# Altium PCB PCB2.PcbDoc (part 1 of 3)
Units mil, origin at the board's own origin, x right, y up, seen from the top; angles counter-clockwise.
Board outline 7178.34 x 3937 mil, 2 copper layers (Top Layer, Bottom Layer); 141 components, 57 nets, 393 pads, 76 vias.
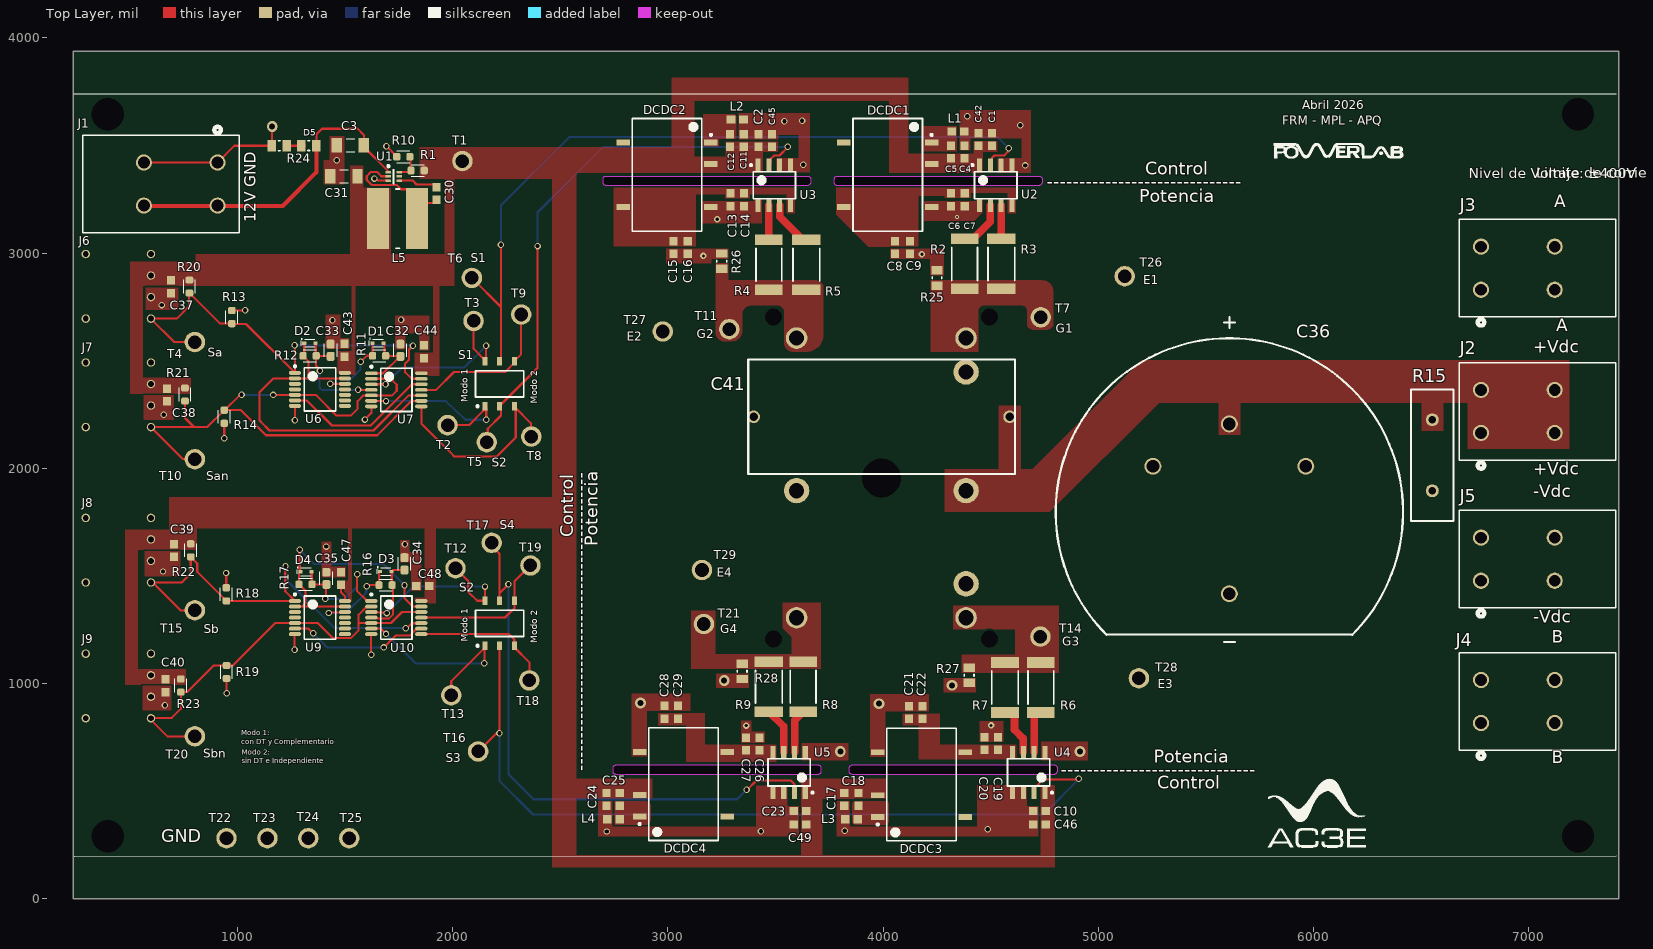
[diagram p0: Top Layer view]
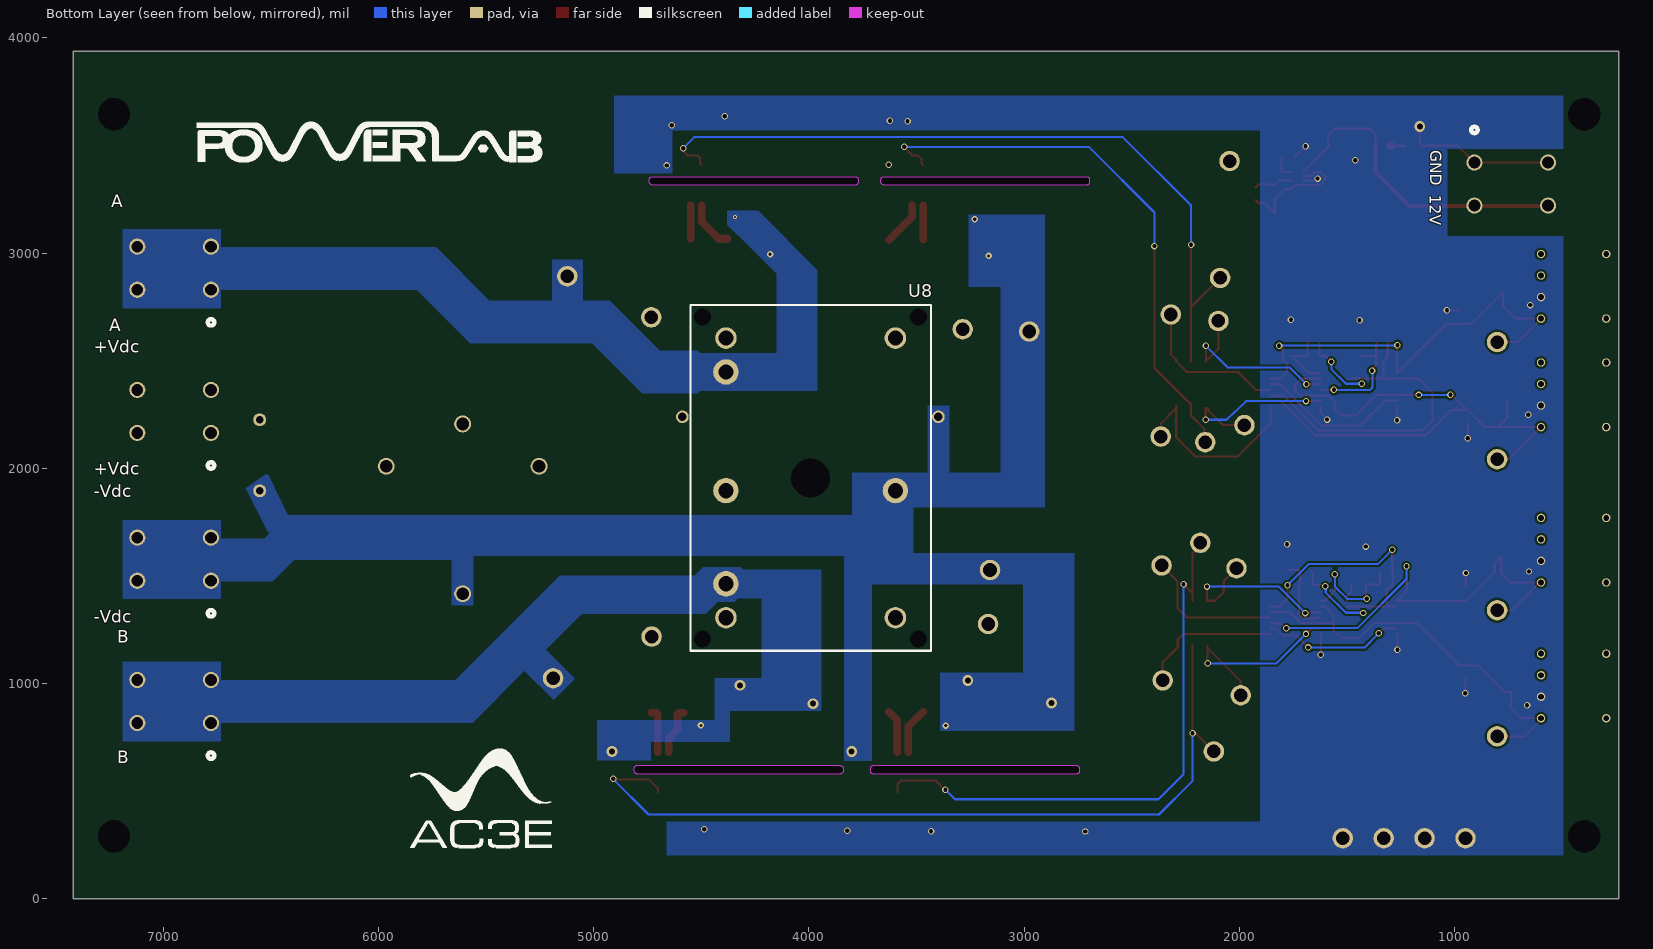
[diagram p1: Bottom Layer view, seen from below]
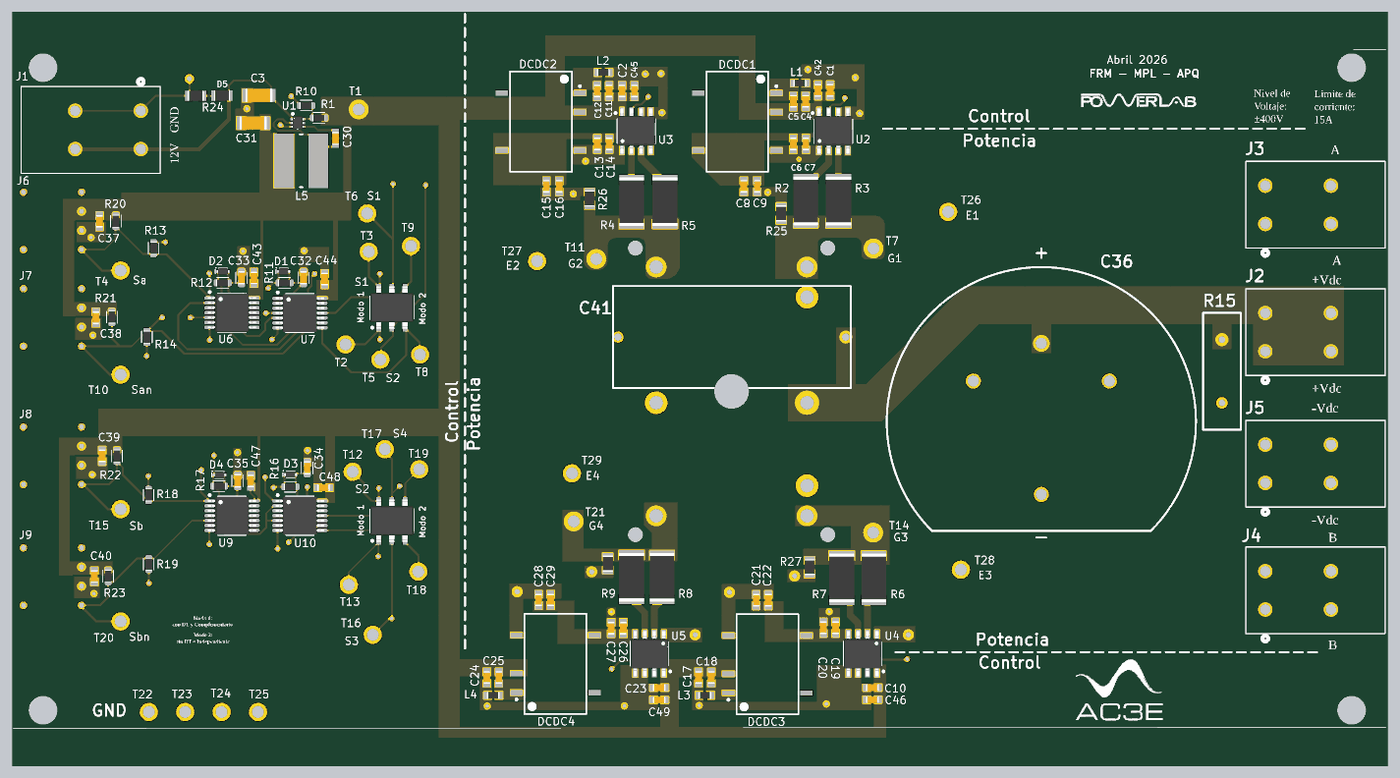
[diagram p2: 3D render of the assembled board from above, using the file's embedded part models]

## Layer stack, top to bottom
Top Solder: solder mask 0.4, Solder Resist, Dk 3.5
Top Layer: signal copper 1.4
Dielectric 1: dielectric 12.6, FR-4, Dk 4.8
Bottom Layer: signal copper 1.4
Bottom Solder: solder mask 0.4, Solder Resist, Dk 3.5

## Board outline
238,0 7416.34,0 7416.34,3937 238,3937
cut-out: 3666,3333 3666,3340 ccw(c3650,3340) 3650,3356 2710,3356 ccw(c2710,3342) 2696,3342 2696,3331 ccw(c2711,3331) 2711,3316 3649,3316 ccw(c3649,3333)
cut-out: 4810,594 4810,607 ccw(c4797,607) 4797,620 3856,620 ccw(c3856,604) 3840,604 3840,596 ccw(c3856,596) 3856,580 4796,580 ccw(c4796,594)
cut-out: 4741,3333 4741,3340 ccw(c4725,3340) 4725,3356 3785,3356 ccw(c3785,3342) 3771,3342 3771,3330 ccw(c3785,3330) 3785,3316 4724,3316 ccw(c4724,3333)
cut-out: 3713,593 3713,606 ccw(c3699,606) 3699,620 2757,620 ccw(c2757,606) 2743,606 2743,593 ccw(c2756,593) 2756,580 3700,580 ccw(c3700,593)

## Design rules (kind name [scope] priority, off if disabled: settings)
Clearance Clearance_Power [InNetClass('Power_Nets') vs InNetClass('Power_Nets')] p1: gap=59.06 ignorepadtopadclearanceinfootprint=FALSE
Clearance Clearance_U1 [InComponent('U1')] p2: gap=7 ignorepadtopadclearanceinfootprint=FALSE
Clearance Clearance_1 [All] p3: gap=10 ignorepadtopadclearanceinfootprint=FALSE
Clearance Clearance_Power_vs_Control [InNetClass('Power_Nets') And  Not InComponent('DCDC1','DCDC2','DCDC3','DCDC4','U2','U3','U4','U5','C6','C7','C8','C9','C13','C14','C15','C16','C19','C20','C21','C22','C26','C27','C28','C29') vs InNetClass('Control_Nets')] p4: gap=80 ignorepadtopadclearanceinfootprint=FALSE
PolygonConnect [All] p1: connectstyle=Direct reliefconductorwidth=10 reliefentries=4 polygonreliefangle="90 Angle" airgapwidth=10
RoutingVias [All] p1: holewidth=28 width=50 viastyle="Through Hole" minholewidth=5 minwidth=5 maxholewidth=28 maxwidth=50
SolderMaskExpansion [All] p1: expansion=4 istentingtop=FALSE
SupplyNets "Schematic Supply Nets_1" [InNet('Vdc')] p1: voltage=0.000
SupplyNets "Schematic Supply Nets" [InNet('-Vdc')] p2: voltage=0.000
SupplyNets "Schematic Supply Nets_6" [InNet('12V')] p3: voltage=0.000
SupplyNets "Schematic Supply Nets_4" [InNet('GND')] p4: voltage=0.000
Width [All] p1: maxlimit=200 minlimit=10 preferedwidth=10 toplayer_maxwidth=40 minimp=50.000000 maximp=50.000000 favimp=50.000000
30 further rules are at their usual default settings.

## Components (designator, comment, footprint, x,y, rotation, side; value= is the part's Value field where it differs from the comment)
C1 "220nF" GRM188R71E224JA88D 4506,3528 r90 top
C2 "220nF" GRM188R71E224JA88D 3420,3524 r90 top
C3 "10µF" GCM31CR71C106KA64K 1524,3501 r0 top
C4 "4.7µF" GRM188R71E224JA88D 4378,3470 r90 top
C5 "4.7µF" GRM188R71E224JA88D 4314,3470 r90 top
C6 "100nF" GRM188R71E224JA88D 4314,3248 r90 top
C7 "10nF" GRM188R71E224JA88D 4379,3248 r90 top
C8 "10µF" GRM188R71E224JA88D 4055,3026.47 r270 top
C9 "4.7µF" GRM188R71E224JA88D 4125,3026.47 r270 top
C10 "220nF" GRM188R71E224JA88D 4726,409 r180 top
C11 "4.7µF" GRM188R71E224JA88D 3352,3524 r90 top
C12 "4.7µF" GRM188R71E224JA88D 3289,3524 r90 top
C13 "100nF" GRM188R71E224JA88D 3290,3248 r90 top
C14 "10nF" GRM188R71E224JA88D 3353,3248 r90 top
C15 "10µF" GRM188R71E224JA88D 3025,3026.47 r270 top
C16 "4.7µF" GRM188R71E224JA88D 3092,3026.47 r270 top
C17 "4.7µF" GRM188R71E224JA88D 3819,462.3 r270 top
C18 "4.7µF" GRM188R71E224JA88D 3885,462.3 r270 top
C19 "100nF" GRM188R71E224JA88D 4534,722 r270 top
C20 "10nF" GRM188R71E224JA88D 4471,722 r270 top
C21 "10µF" GRM188R71E224JA88D 4120,866 r90 top
C22 "4.7µF" GRM188R71E224JA88D 4183,866 r90 top
C23 "220nF" GRM188R71E224JA88D 3613,409 r180 top
C24 "4.7µF" GRM188R71E224JA88D 2714,462.3 r270 top
C25 "4.7µF" GRM188R71E224JA88D 2776,462.3 r270 top
C26 "100nF" GRM188R71E224JA88D 3426,720 r270 top
C27 "10nF" GRM188R71E224JA88D 3363,720 r270 top
C28 "10µF" GRM188R71E224JA88D 2984,867 r90 top
C29 "4.7µF" GRM188R71E224JA88D 3047,867 r90 top
C30 "100nF" GRM188R71E224JA88D 1924,3277 r90 top
C31 "22µF" GCM31CR71C106KA64K 1494.01,3357 r0 top
C32 "470pF" "C0603 - MURATA" 1757,2549 r270 top
C33 "470pF" "C0603 - MURATA" 1433,2549 r270 top
C34 "470pF" "C0603 - MURATA" 1776,1556.54 r270 top
C35 "470pF" "C0603 - MURATA" 1413,1489 r270 top
C36 "1000uF" 1316N 5608.31,1467.72 r0 top
C37 "100nF" GRM188R71E224JA88D 692,2844 r270 top
C38 "100nF" GRM188R71E224JA88D 673,2341 r270 top
C39 "100nF" GRM188R71E224JA88D 706,1619 r270 top
C40 "100nF" GRM188R71E224JA88D 665,990 r270 top
C41 "1µF" MKT1813510405 3992.71,2239.65 r0 top
C42 "10µF" GRM188R71E224JA88D 4442,3528 r270 top
C43 "100nF" GRM188R71E224JA88D 1498,2549 r270 top
C44 "100nF" GRM188R71E224JA88D 1867,2542 r270 top
C45 "10µF" GRM188R71E224JA88D 3484,3524 r270 top
C46 "10µF" GRM188R71E224JA88D 4726,346 r0 top
C47 "100nF" GRM188R71E224JA88D 1481,1488 r270 top
C48 "100nF" GRM188R71E224JA88D 1861,1453 r0 top
C49 "10µF" GRM188R71E224JA88D 3613,345 r0 top
D1 "NSVRB751S40T1G" NSVRB751S40T1G 1653,2582 r0 top
D2 "NSVRB751S40T1G" NSVRB751S40T1G 1336,2582 r0 top
D3 "NSVRB751S40T1G" NSVRB751S40T1G 1689,1521 r0 top
D4 "NSVRB751S40T1G" NSVRB751S40T1G 1318,1520 r0 top
D5 "1kΩ" RC0805JR-101KL 1331,3500 r0 top
DCDC1 "PBT02F05S15" PBT02F05S15 4021.26,3364 r180 top
DCDC2 "PBT02F05S15" PBT02F05S15 2996,3364 r180 top
DCDC3 "PBT02F05S15" PBT02F05S15 4178.26,531.3 r0 top
DCDC4 "PBT02F05S15" PBT02F05S15 3072,533 r0 top
J1 "1017503" CONN_1017491 565,3221 r270 top
J2 "1017503" CONN_1017491 7120,2365 r90 top
J3 "1017503" CONN_1017491 7120,3030 r90 top
J4 "1017503" CONN_1017491 7120,1017 r90 top
J5 "1017503" CONN_1017491 7120,1678 r90 top
J6 "HFBR-0500ETZ" HFBR-0500ETZ 598,2696 r270 top
J7 "HFBR-0500ETZ" HFBR-0500ETZ 598,2192 r270 top
J8 "HFBR-0500ETZ" HFBR-0500ETZ 598,1470 r270 top
J9 "HFBR-0500ETZ" HFBR-0500ETZ 598,839 r270 top
L1 "LQM18DN220M70L" LQM18DN220M70L 4348,3565 r180 top
L2 "LQM18DN220M70L" LQM18DN220M70L 3322,3621 r180 top
L3 "LQM18DN220M70L" LQM18DN220M70L 3852,369.3 r0 top
L4 "LQM18DN220M70L" LQM18DN220M70L 2747,369.3 r0 top
L5 "3.3µH" 29332C 1744.45,3160 r180 top
R1 "52.3kΩ" "R0603 - YAGEO" 1837,3384 r0 top
R2 "10Ω" SR2512JK-0710RL 4378,2950 r270 top
R3 "3.3Ω" RMC1-3R30FTE 4549,2950 r270 top
R4 "10Ω" SR2512JK-0710RL 3469,2946 r270 top
R5 "3.3Ω" RMC1-3R30FTE 3643,2946 r270 top
R6 "10Ω" SR2512JK-0710RL 4733,982 r90 top
R7 "3.3Ω" RMC1-3R30FTE 4566,982 r90 top
R8 "10Ω" SR2512JK-0710RL 3628,985 r90 top
R9 "3.3Ω" RMC1-3R30FTE 3469,986 r90 top
R10 "10kΩ" "R0603 - YAGEO" 1770.49,3448 r0 top
R11 "3.09kΩ" "R0603 - YAGEO" 1658,2523 r180 top
R12 "3.09kΩ" "R0603 - YAGEO" 1335,2523 r180 top
R13 "10kΩ" "R0603 - YAGEO" 974,2703 r270 top
R14 "10kΩ" "R0603 - YAGEO" 939,2240 r90 top
R15 "100kΩ" MFR200FRF73-100K 6551.18,2061.02 r90 top
R16 "3.09kΩ" "R0603 - YAGEO" 1688,1458 r180 top
R17 "3.09kΩ" "R0603 - YAGEO" 1316,1461 r180 top
R18 "10kΩ" "R0603 - YAGEO" 948,1415 r270 top
R19 "10kΩ" "R0603 - YAGEO" 949,1054 r90 top
R20 "1kΩ" "R0603 - YAGEO" 777,2845 r90 top
R21 "1kΩ" "R0603 - YAGEO" 756,2343 r90 top
R22 "1kΩ" "R0603 - YAGEO" 783,1619 r90 top
R23 "1kΩ" "R0603 - YAGEO" 737,991 r90 top
R24 "1kΩ" RC0805JR-101KL 1194,3499 r0 top
R25 "10kΩ" RC0805JR-101KL 4250,2885 r90 top
R26 "10kΩ" RC0805JR-101KL 3250,2963 r90 top
R27 "10kΩ" RC0805JR-101KL 4399,1038.43 r270 top
R28 "10kΩ" RC0805JR-101KL 3345,1057 r270 top
S1 "SW_DPDT_CAS-220TB1" CAS-220-TB1 2218,2393 r90 top
S2 "SW_DPDT_CAS-220TB1" CAS-220-TB1 2218,1280 r90 top
T1 "THM_Test_Points" Test_Point#1 2045,3428 r0 top
T2 "THM_Test_Points" Test_Point#1 1976,2201 r0 top
T3 "THM_Test_Points" Test_Point#1 2097,2685 r0 top
T4 "THM_Test_Points" Test_Point#1 802,2587 r0 top
T5 "THM_Test_Points" Test_Point#1 2158,2122 r0 top
T6 "THM_Test_Points" Test_Point#1 2089,2885 r0 top
T7 "THM_Test_Points" Test_Point#1 4732,2702 r0 top
T8 "THM_Test_Points" Test_Point#1 2365,2148 r0 top
T9 "THM_Test_Points" Test_Point#1 2318,2715 r0 top
T10 "THM_Test_Points" Test_Point#2 757,2043 r0 top
T11 "THM_Test_Points" Test_Point#1 3285,2647 r0 top
T12 "THM_Test_Points" Test_Point#1 2013,1536 r0 top
T13 "THM_Test_Points" Test_Point#1 1993,946 r0 top
T14 "THM_Test_Points" Test_Point#1 4730.31,1218.5 r0 top
T15 "THM_Test_Points" Test_Point#3 817,1344 r0 top
T16 "THM_Test_Points" Test_Point#1 2118,685 r0 top
T17 "THM_Test_Points" Test_Point#1 2181,1654 r0 top
T18 "THM_Test_Points" Test_Point#1 2356,1015 r0 top
T19 "THM_Test_Points" Test_Point#1 2361,1549 r0 top
T20 "THM_Test_Points" Test_Point#4 804,755 r0 top
T21 "THM_Test_Points" Test_Point#1 3167,1277 r0 top
T22 "THM_Test_Points" Test_Point#1 949,282 r0 top
T23 "THM_Test_Points" Test_Point#1 1139,282 r0 top
T24 "THM_Test_Points" Test_Point#5 1329,281 r0 top
T25 "THM_Test_Points" Test_Point#5 1519,281 r0 top
T26 "THM_Test_Points" Test_Point#1 5122,2893 r0 top
T27 "THM_Test_Points" Test_Point#1 2976,2636 r0 top
T28 "THM_Test_Points" Test_Point#1 5188,1025 r0 top
T29 "THM_Test_Points" Test_Point#1 3158,1528 r0 top
U1 "AP62301Z6-7" AP62301Z6-6N 1726,3357 r0 top
U2 "NCV51152BADR2G" SOIC-NCV51152BADR2G 4523,3315.3 r270 top
U3 "NCV51152BADR2G" SOIC-NCV51152BADR2G 3494,3315.3 r270 top
U4 "NCV51152BADR2G" SOIC-NCV51152BADR2G 4676,587.3 r90 top
U5 "NCV51152BADR2G" SOIC-NCV51152BADR2G 3563,587.3 r90 top
U6 "74VHCT04AFT" 74VHCT04AFT 1383,2367 r0 top
U7 "74HC08T14-13" 74HC08T14-13 1738,2365 r0 top
U8 "SK15GH063" SK15GH063 3440.16,2753 r90 bottom
U9 "74VHCT04AFT" 74VHCT04AFT 1383,1307 r0 top
U10 "74HC08T14-13" 74HC08T14-13 1738,1307 r0 top

## Footprints (in the part's own frame and the unit in brackets; to place one, negate y for a bottom-side part, rotate by r counter-clockwise, add the part's x,y. Pads: shape width x height; smd on the part's side, far side on the other; paste and mask are expansions set on the pad)
74HC08T14-13 [mm] "TSOP, 14-Leads, Body 5,00x4,40mm, Pitch 0,65mm, IPC Medium Density"
  oval 1.45x0.45 smd: 1(-2.95,1.95) 2(-2.95,1.3) 3(-2.95,0.65) 4(-2.95,0) 5(-2.95,-0.65) 6(-2.95,-1.3) 7(-2.95,-1.95) 8(2.95,-1.95) 9(2.95,-1.3) 10(2.95,-0.65) 11(2.95,0) 12(2.95,0.65) 13(2.95,1.3) 14(2.95,1.95)
  silkscreen extent -3.07,-2.55 1.85,2.85, body extent -3.2,-2.55 3.2,2.55, height 1.2
74VHCT04AFT [mm] "TSOP, 14-Leads, Body 5,00x4,40mm, Pitch 0,65mm, IPC Medium Density"
  oval 1.45x0.45 smd: 1(-2.95,1.95) 2(-2.95,1.3) 3(-2.95,0.65) 4(-2.95,0) 5(-2.95,-0.65) 6(-2.95,-1.3) 7(-2.95,-1.95) 8(2.95,-1.95) 9(2.95,-1.3) 10(2.95,-0.65) 11(2.95,0) 12(2.95,0.65) 13(2.95,1.3) 14(2.95,1.95)
  silkscreen extent -3.07,-2.55 1.85,2.85, body extent -3.2,-2.55 3.2,2.55, height 1.2
1316N [mm]
  round 2 hole 1.5: 2(-9.024,13.77) 3(9.024,13.77) V+(0,18.77) V-(0,-1.27)
  silkscreen extent -20.5,-6.98 20.5,31.37
29332C [mm] "Precision Wire Wound Inductor, 2-Leads, Body 5,00x7,00mm, IPC Medium Density, 3.3uH"
  rect 2.6x7.2 smd: 1(-2.3,0) 2(2.3,0)
  silkscreen extent -0.2,-3.5 0.2,3.5
AP62301Z6-6N [mm] "SOTFL, 6-Leads, Body 1,60x1,60mm, Pitch 0,50mm, IPC Medium Density"
  rect 0.67x0.3 smd: 1(-0.635,0.5) 2(-0.635,0) 3(-0.635,-0.5) 4(0.635,-0.5) 5(0.635,0) 6(0.635,0.5)
  silkscreen extent -0.76,-0.85 0.05,1.32, body extent -0.8,-0.85 0.8,0.85, height 0.6
"C0603 - MURATA" [mm]
  rrect50% 1.05x0.95 smd: 1(-0.725,0) 2(0.725,0)
  silkscreen extent -0.76,-0.76 0.76,0.76, body extent -0.9,-0.45 0.9,0.45, height 0.9
CAS-220-TB1 [mm] "SOT23, 6-Leads, Body 5,40x5,10mm, Pitch 1,75mm, IPC Medium Density"
  rect 1x0.6 smd: 1(-2.65,1.75) 2(-2.65,0) 3(-2.65,-1.75) 4(2.65,1.75) 5(2.65,0) 6(2.65,-1.75)
  silkscreen extent -2.77,-2.85 1.55,2.85, body extent -2.8,-2.85 2.8,2.85, height 2.5
CONN_1017491 [mil]
  round 75 / inner round 60 / far side round 75 hole 55 paste-99999 mask+0: 1(-200,342.52) 2(0,342.52) 3(-200,0) 4(0,0)
  silkscreen extent -366,-283 127,444
GCM31CR71C106KA64K [mm] "Chip Capacitor, 2-Leads, Body 3,50x1,60mm, IPC Medium Density"
  rect 1.2x1.7 smd: 1(-1.6,0) 2(1.6,0)
  silkscreen extent -0.5,-0.75 0.5,0.75, body extent -1.8,-0.9 1.8,0.9, height 1.6
GRM188R71E224JA88D [mm] "Chip Capacitor, 2-Leads, Body 1,60x0,80mm, IPC Medium Density"
  rect 1x0.95 smd: 1(-0.75,0) 2(0.75,0)
  body extent -0.85,-0.45 0.85,0.45, height 0.9
HFBR-0500ETZ [mm]
  round 1 hole 0.7: 1(0,0) 2(-2.54,0) 3(-5.08,0) 4(-7.62,0) 5(-7.62,-7.7) 8(0,-7.7)
LQM18DN220M70L [mm] "Chip Inductor, 2-Leads, Body 1,60x0,80mm, IPC Medium Density"
  rect 1.02x0.98 smd: 1(-0.74,0) 2(0.74,0)
  body extent -0.87,-0.48 0.87,0.48, height 0.95
MFR200FRF73-100K [mil]
  round 60 hole 35.43: 1(-165,0) 2(165,0)
  silkscreen extent -305,-98 305,98
MKT1813510405 [mm] "Capacitores de películas 1uF 400V 10%"
  round 1.5 hole 1: 1(-15.105,0) 2(15.105,0)
  silkscreen extent -15.75,-6.76 15.75,6.76
NSVRB751S40T1G [mm] "SODFL, 2-Leads, Body 0,80x1,60mm, IPC Medium Density"
  rect 0.48x0.4 smd: 1(-0.66,0) 2(0.66,0)
  silkscreen extent -1.02,-0.45 0.6,0.55, body extent -0.8,-0.45 0.8,0.45, height 0.7
PBT02F05S15 [mm] "SOP, 8-Leads, Body 12,75x8,50mm, Pitch 2,54mm, IPC Medium Density"
  rect 1.6x0.7 smd: 1(-5.175,-3.81) 2(-5.175,-1.27) 4(-5.175,3.81) 5(5.175,3.81) 8(5.175,-3.81)
  silkscreen extent -5.3,-6.65 4.1,6.65, body extent -4.5,-6.65 4.5,6.65, height 9
"R0603 - YAGEO" [mm]
  rrect50% 0.85x0.9 smd: 1(-0.775,0) 2(0.775,0)
  silkscreen extent -0.77,-0.7 0.77,0.7, body extent -0.85,-0.45 0.85,0.45, height 0.55
RC0805JR-101KL [mm] "Chip Resistor, 2-Leads, Body 2,00x1,25mm, IPC Medium Density"
  rect 1x1.35 smd: 1(-0.9,0) 2(0.9,0)
  silkscreen extent -0.1,-0.58 0.1,0.58, body extent -1.05,-0.67 1.05,0.67, height 0.6
RMC1-3R30FTE [mm] "Chip Resistor, 2-Leads, Body 6,35x3,20mm, IPC Medium Density"
  rect 1.25x3.35 smd: 1(-2.95,0) 2(2.95,0)
  silkscreen extent -1.95,-1.58 1.95,1.58, body extent -3.22,-1.68 3.22,1.68, height 0.7
SK15GH063 [mm]
  round 2.54 hole 1.8: 1(-3.75,24) 8(-36.75,24) 9(-3.75,4) 16(-36.75,4)
  round 2.997 hole 1.8: 2(-7.75,24) 5(-21.75,24) 7(-32.75,24) 13(-21.75,4)
  round 0.127 hole 2 unplated: 9(-39.25,1.25) 9(-39.25,26.75) 9(-1.25,1.25) 9(-1.25,26.75)
  round 0.127 hole 4.6 unplated: 9(-20.25,14)
  silkscreen extent -40.65,-0.2 0.15,28.19
SOIC-NCV51152BADR2G [mm] "Soic Gate Driver Insolated, Single channel, Gate driver"
  rect 1.52x0.6 smd: 1(-2.38,-1.905) 2(-2.38,-0.635) 3(-2.38,0.635) 4(-2.38,1.905) 5(2.38,1.905) 6(2.38,0.635) 7(2.38,-0.635) 8(2.38,-1.905)
  silkscreen extent -2.5,-2.88 1.6,2.5, body extent -3,-2.5 3,2.5, height 1.75
SR2512JK-0710RL [mm] "Chip Resistor, 2-Leads, Body 6,35x3,10mm, IPC Medium Density"
  rect 1.25x3.25 smd: 1(-2.95,0) 2(2.95,0)
  silkscreen extent -1.95,-1.53 1.95,1.52, body extent -3.22,-1.63 3.22,1.63, height 0.65
Test_Point#1 [mil]
  round 95 hole 63: 1(0,0)
Test_Point#2 [mil]
  round 95 hole 63: 1(45,0)
Test_Point#3 [mil]
  round 95 hole 63: 1(-15,-3)
Test_Point#4 [mil]
  round 95 hole 63: 1(-2,0)
Test_Point#5 [mil]
  round 95 hole 63: 1(0,1)

## Part data
C1 C2 C10 C23: library part CAP_GRM188R71E224JA88D, "Ceramic Capacitor, Ceramic, 25V, 5% +Tol, 5% -Tol, X7R, 15% TC, 0.22uF, Surface Mount, 0603", .Case/Package=0603, .Voltage Rating (DC)=25V, Dielectric=X7R, Dielectric Material=Ceramic, Manufacturer=Murata, Manufacturer Lifecycle Status="IN PRODUCTION", Manufacturer Part Number=GRM188R71E224JA88D, Max Operating Temperature=125°C, Min Operating Temperature=-55°C, Supplier Part Number 1=81-GRM188R71E224JA8D, Tolerance=5%, Capacitance=220nF, Case/Package=0603, Category="Ceramic Capacitors", ComponentLink1Description=https://datasheet.octopart.com:443/GRM188R71E224JA88D-Murata-datasheet-141275257.pdf?src-supplier=Geoflip, ComponentLink1URL=https://datasheet.octopart.com:443/GRM188R71E224JA88D-Murata-datasheet-141275257.pdf?src-supplier=Geoflip, ComponentLink2Description=https://datasheet.octopart.com:443/GRM188R71E224JA88D-Murata-datasheet-155239114.pdf?src-supplier=element14+APAC, ComponentLink2URL=https://datasheet.octopart.com:443/GRM188R71E224JA88D-Murata-datasheet-155239114.pdf?src-supplier=element14+APAC, ComponentLink3Description=https://datasheet.octopart.com:443/GRM188R71E224JA88D-Murata-datasheet-165579666.pdf?src-supplier=TME, ComponentLink3URL=https://datasheet.octopart.com:443/GRM188R71E224JA88D-Murata-datasheet-165579666.pdf?src-supplier=TME, ComponentLink4Description=https://datasheet.octopart.com:443/GRM188R71E224JA88D-Murata-datasheet-140705547.pdf?src-supplier=Ciiva, ComponentLink4URL=https://datasheet.octopart.com:443/GRM188R71E224JA88D-Murata-datasheet-140705547.pdf?src-supplier=Ciiva, ComponentLink5Description=https://datasheet.octopart.com:443/GRM188R71E224JA88D-Murata-datasheet-138743095.pdf?src-supplier=Ciiva, ComponentLink5URL=https://datasheet.octopart.com:443/GRM188R71E224JA88D-Murata-datasheet-138743095.pdf?src-supplier=Ciiva, ComponentLink6Description=https://datasheet.octopart.com/GRM188R71E224JA88D-Murata-datasheet-12515295.pdf, ComponentLink6URL=https://datasheet.octopart.com/GRM188R71E224JA88D-Murata-datasheet-12515295.pdf, ComponentLink7Description=https://datasheet.octopart.com/GRM188R71E224JA88D-Murata-datasheet-12510076.pdf, ComponentLink7URL=https://datasheet.octopart.com/GRM188R71E224JA88D-Murata-datasheet-12510076.pdf, ComponentLink8Description=https://datasheet.octopart.com/GRM188R71E224JA88D-Murata-datasheet-11978611.pdf, ComponentLink8URL=https://datasheet.octopart.com/GRM188R71E224JA88D-Murata-datasheet-11978611.pdf, ComponentLink9Description=https://datasheet.octopart.com/GRM188R71E224JA88D-Murata-datasheet-10025737.pdf, ComponentLink9URL=https://datasheet.octopart.com/GRM188R71E224JA88D-Murata-datasheet-10025737.pdf, ComponentLink10Description=https://datasheet.octopart.com/GRM188R71E224JA88D-Murata-datasheet-8819587.pdf, ComponentLink10URL=https://datasheet.octopart.com/GRM188R71E224JA88D-Murata-datasheet-8819587.pdf, ComponentLink11Description=https://datasheet.octopart.com/GRM188R71E224JA88D-Murata-datasheet-38895632.pdf, ComponentLink11URL=https://datasheet.octopart.com/GRM188R71E224JA88D-Murata-datasheet-38895632.pdf, ComponentLink12Description=http://sigma.octopart.com:80/reach_statement/Murata-company-16.pdf?src-supplier=Compliance+Statements, ComponentLink12URL=http://sigma.octopart.com:80/reach_statement/Murata-company-16.pdf?src-supplier=Compliance+Statements, Height=800µm, Length=1.6mm, Lifecycle Status=Production, Material=Ceramic, Mount="Surface Mount", Number of Terminals=2, Pricing 1="1=0,1, 10=0,038, 50=0,038, 100=0,032, 1000=0,021, 10000=0,016 (USD)", REACH SVHC=Yes, RoHS=Compliant, Stock 1=27729, Supplier 1=Mouser, Thickness=800µm, Voltage Rating=25V, Voltage Rating (DC)=25V, Width=800µm
C3: library part GCM31CR71C106KA4K, "16V 10uF X7R ±10% 1206 Multilayer Ceramic Capacitors MLCC - SMD/SMT ROHS", .Case/Package=1206, .Voltage Rating (DC)=16V, Case Code (Metric)=3216, Dielectric=X7R, Dielectric Material=Ceramic, Manufacturer=Murata, Manufacturer Lifecycle Status="IN PRODUCTION", Manufacturer Part Number=GCM31CR71C106KA64K, Max Operating Temperature=125°C, Min Operating Temperature=-55°C, Supplier Part Number 1=81-GCM31CR71C106KA4K, Tolerance=10%, Capacitance=10µF, Case Code (Imperial)=1206, Case/Package=1206, Category="Ceramic Capacitors", ComponentLink1Description=https://datasheet.octopart.com:443/GCM31CR71C106KA64K-Murata-datasheet-149522739.pdf?src-supplier=Newark, ComponentLink1URL=https://datasheet.octopart.com:443/GCM31CR71C106KA64K-Murata-datasheet-149522739.pdf?src-supplier=Newark, ComponentLink2Description=https://datasheet.octopart.com:443/GCM31CR71C106KA64K-Murata-datasheet-141269144.pdf?src-supplier=Geoflip, ComponentLink2URL=https://datasheet.octopart.com:443/GCM31CR71C106KA64K-Murata-datasheet-141269144.pdf?src-supplier=Geoflip, ComponentLink3Description=https://datasheet.octopart.com:443/GCM31CR71C106KA64K-Murata-datasheet-140661156.pdf?src-supplier=Ciiva, ComponentLink3URL=https://datasheet.octopart.com:443/GCM31CR71C106KA64K-Murata-datasheet-140661156.pdf?src-supplier=Ciiva, ComponentLink4Description=https://datasheet.octopart.com:443/GCM31CR71C106KA64K-Murata-datasheet-138720316.pdf?src-supplier=Ciiva, ComponentLink4URL=https://datasheet.octopart.com:443/GCM31CR71C106KA64K-Murata-datasheet-138720316.pdf?src-supplier=Ciiva, ComponentLink5Description=https://datasheet.octopart.com:443/GCM31CR71C106KA64K-Murata-datasheet-12511495.pdf?src-supplier=TME, ComponentLink5URL=https://datasheet.octopart.com:443/GCM31CR71C106KA64K-Murata-datasheet-12511495.pdf?src-supplier=TME, ComponentLink6Description=https://datasheet.octopart.com/GCM31CR71C106KA64K-Murata-datasheet-14404607.pdf, ComponentLink6URL=https://datasheet.octopart.com/GCM31CR71C106KA64K-Murata-datasheet-14404607.pdf, ComponentLink7Description=http://sigma.octopart.com:80/reach_statement/Murata-company-16.pdf?src-supplier=Compliance+Statements, ComponentLink7URL=http://sigma.octopart.com:80/reach_statement/Murata-company-16.pdf?src-supplier=Compliance+Statements, Depth=1.6mm, Export Control Classification Number (ECCN) Code=EAR99, Harmonized Tariff Schedule (HTS) Code=8532.24.00.20, Height=1.6mm, Introduction Date=2007-06-21, Length=3.2mm, Lifecycle Status=Production, Material=Ceramic, Mount="Surface Mount", Number of Terminals=2, Packaging="Tape & Reel", Pricing 1="1=0,45, 10=0,234, 50=0,234, 100=0,184, 1000=0,145, 10000=0,118 (USD)", Radiation Hardening=No, REACH SVHC=Yes, RoHS=Compliant, Schedule B="8532240020, 8532240020|8532240020, 8532240020|8532240020|8532240020, 8532240020|8532240020|8532240020|8532240020", Stock 1=30347, Supplier 1=Mouser, Termination=SMD/SMT, Thickness=1.6mm, Voltage Rating=16V, Voltage Rating (DC)=16V, Width=1.6mm
C4 C5 C9 C11 C12 C16 C17 C18 C22 C24 C25 C29: library part CAP_GRM188R61E475KE11D, "0603 4.7 uF 25 V ±10 % Tolerance X5R SMT Multilayer Ceramic Capacitor", .Case/Package=0603, .Voltage Rating (DC)=25V, Case Code (Metric)=1608, Dielectric=X5R, Dielectric Material=Ceramic, Manufacturer=Murata, Manufacturer Lifecycle Status="IN PRODUCTION", Manufacturer Part Number=GRM188R61E475KE11D, Max Operating Temperature=85°C, Min Operating Temperature=-55°C, Supplier Part Number 1=81-GRM188R61E475KE1D, Tolerance=10%, Capacitance=4.7µF, Case Code (Imperial)=0603, Case/Package=0603, Category="Ceramic Capacitors", ComponentLink1Description=https://datasheet.octopart.com:443/GRM188R61E475KE11D-Murata-datasheet-27203393.pdf?src-supplier=Newark, ComponentLink1URL=https://datasheet.octopart.com:443/GRM188R61E475KE11D-Murata-datasheet-27203393.pdf?src-supplier=Newark, ComponentLink2Description=https://datasheet.octopart.com:443/GRM188R61E475KE11D-Murata-datasheet-44506546.pdf?src-supplier=Newark, ComponentLink2URL=https://datasheet.octopart.com:443/GRM188R61E475KE11D-Murata-datasheet-44506546.pdf?src-supplier=Newark, ComponentLink3Description=https://datasheet.octopart.com:443/GRM188R61E475KE11D-Murata-datasheet-62317199.pdf?src-supplier=element14+APAC, ComponentLink3URL=https://datasheet.octopart.com:443/GRM188R61E475KE11D-Murata-datasheet-62317199.pdf?src-supplier=element14+APAC, ComponentLink4Description=https://datasheet.octopart.com:443/GRM188R61E475KE11D-Murata-datasheet-14397282.pdf?src-supplier=Future+Electronics, ComponentLink4URL=https://datasheet.octopart.com:443/GRM188R61E475KE11D-Murata-datasheet-14397282.pdf?src-supplier=Future+Electronics, ComponentLink5Description=https://datasheet.octopart.com:443/GRM188R61E475KE11D-Murata-datasheet-78375012.pdf?src-supplier=Future+Electronics, ComponentLink5URL=https://datasheet.octopart.com:443/GRM188R61E475KE11D-Murata-datasheet-78375012.pdf?src-supplier=Future+Electronics, ComponentLink6Description=https://datasheet.octopart.com:443/GRM188R61E475KE11D-Murata-datasheet-179108037.pdf?src-supplier=Arrow.cn, ComponentLink6URL=https://datasheet.octopart.com:443/GRM188R61E475KE11D-Murata-datasheet-179108037.pdf?src-supplier=Arrow.cn, ComponentLink7Description=https://datasheet.octopart.com:443/GRM188R61E475KE11D-Murata-datasheet-165579666.pdf?src-supplier=TME, ComponentLink7URL=https://datasheet.octopart.com:443/GRM188R61E475KE11D-Murata-datasheet-165579666.pdf?src-supplier=TME, ComponentLink8Description=https://datasheet.octopart.com:443/GRM188R61E475KE11D-Murata-datasheet-141274968.pdf?src-supplier=Ciiva, ComponentLink8URL=https://datasheet.octopart.com:443/GRM188R61E475KE11D-Murata-datasheet-141274968.pdf?src-supplier=Ciiva, ComponentLink9Description=https://datasheet.octopart.com:443/GRM188R61E475KE11D-Murata-datasheet-140705133.pdf?src-supplier=Ciiva, ComponentLink9URL=https://datasheet.octopart.com:443/GRM188R61E475KE11D-Murata-datasheet-140705133.pdf?src-supplier=Ciiva, ComponentLink10Description=https://datasheet.octopart.com:443/GRM188R61E475KE11D-Murata-datasheet-138742897.pdf?src-supplier=Ciiva, ComponentLink10URL=https://datasheet.octopart.com:443/GRM188R61E475KE11D-Murata-datasheet-138742897.pdf?src-supplier=Ciiva, ComponentLink11Description=https://datasheet.octopart.com/GRM188R61E475KE11D-Murata-datasheet-12515295.pdf, ComponentLink11URL=https://datasheet.octopart.com/GRM188R61E475KE11D-Murata-datasheet-12515295.pdf, ComponentLink12Description=https://datasheet.octopart.com/GRM188R61E475KE11D-Murata-datasheet-12510076.pdf, ComponentLink12URL=https://datasheet.octopart.com/GRM188R61E475KE11D-Murata-datasheet-12510076.pdf, ComponentLink13Description=https://datasheet.octopart.com/GRM188R61E475KE11D-Murata-datasheet-11978611.pdf, ComponentLink13URL=https://datasheet.octopart.com/GRM188R61E475KE11D-Murata-datasheet-11978611.pdf, ComponentLink14Description=https://datasheet.octopart.com/GRM188R61E475KE11D-Murata-datasheet-10025737.pdf, ComponentLink14URL=https://datasheet.octopart.com/GRM188R61E475KE11D-Murata-datasheet-10025737.pdf, ComponentLink15Description=https://datasheet.octopart.com/GRM188R61E475KE11D-Murata-datasheet-8819587.pdf, ComponentLink15URL=https://datasheet.octopart.com/GRM188R61E475KE11D-Murata-datasheet-8819587.pdf, ComponentLink16Description=http://sigma.octopart.com:80/reach_statement/Murata-company-16.pdf?src-supplier=Compliance+Statements, ComponentLink16URL=http://sigma.octopart.com:80/reach_statement/Murata-company-16.pdf?src-supplier=Compliance+Statements, Depth=800µm, Height=800µm, Lead Free="Lead Free", Length=1.6mm, Lifecycle Status=Production, Material=Ceramic, Mount="Surface Mount", Number of Terminals=2, Pricing 1="1=0,1, 10=0,036, 50=0,036, 100=0,036, 1000=0,036, 10000=0,03 (USD)", REACH SVHC=Yes, RoHS=Compliant, Schedule B="8532240020, 8532240020|8532240020, 8532240020|8532240020|8532240020, 8532240020|8532240020|8532240020|8532240020", Stock 1=187011, Supplier 1=Mouser, Thickness=800µm, Voltage=25V, Voltage Rating=25V, Voltage Rating (DC)=25V, Width=800µm
C6 C13 C19 C26 C30 C37 C38 C39 C40 C43 C44 C47 C48: library part CAP_GCJ188R71E104KA12D, "Ceramic Capacitor, Ceramic, 25V, 10% +Tol, 10% -Tol, X7R, 15% TC, 0.1uF, Surface Mount, 0603", .Case/Package=0603, .Voltage Rating (DC)=25V, Dielectric Material=Ceramic, Manufacturer=Murata, Manufacturer Lifecycle Status="IN PRODUCTION", Manufacturer Part Number=GCJ188R71E104KA12D, Max Operating Temperature=125°C, Min Operating Temperature=-55°C, Supplier Part Number 1=81-GCJ188R71E104KA2D, Tolerance=10%, Capacitance=100nF, Case/Package=0603, Category="Ceramic Capacitors", ComponentLink1Description=https://datasheet.octopart.com:443/GCJ188R71E104KA12D-Murata-datasheet-149522263.pdf?src-supplier=Newark, ComponentLink1URL=https://datasheet.octopart.com:443/GCJ188R71E104KA12D-Murata-datasheet-149522263.pdf?src-supplier=Newark, ComponentLink2Description=https://datasheet.octopart.com:443/GCJ188R71E104KA12D-Murata-datasheet-141264622.pdf?src-supplier=Geoflip, ComponentLink2URL=https://datasheet.octopart.com:443/GCJ188R71E104KA12D-Murata-datasheet-141264622.pdf?src-supplier=Geoflip, ComponentLink3Description=https://datasheet.octopart.com:443/GCJ188R71E104KA12D-Murata-datasheet-140654708.pdf?src-supplier=Ciiva, ComponentLink3URL=https://datasheet.octopart.com:443/GCJ188R71E104KA12D-Murata-datasheet-140654708.pdf?src-supplier=Ciiva, ComponentLink4Description=https://datasheet.octopart.com:443/GCJ188R71E104KA12D-Murata-datasheet-138714381.pdf?src-supplier=Ciiva, ComponentLink4URL=https://datasheet.octopart.com:443/GCJ188R71E104KA12D-Murata-datasheet-138714381.pdf?src-supplier=Ciiva, ComponentLink5Description=https://datasheet.octopart.com:443/GCJ188R71E104KA12D-Murata-datasheet-165611796.pdf?src-supplier=TME, ComponentLink5URL=https://datasheet.octopart.com:443/GCJ188R71E104KA12D-Murata-datasheet-165611796.pdf?src-supplier=TME, ComponentLink6Description=http://sigma.octopart.com:80/reach_statement/Murata-company-16.pdf?src-supplier=Compliance+Statements, ComponentLink6URL=http://sigma.octopart.com:80/reach_statement/Murata-company-16.pdf?src-supplier=Compliance+Statements, Height=800µm, Length=1.6mm, Lifecycle Status=Production, Material=Ceramic, Mount="Surface Mount", Number of Terminals=2, Pricing 1="1=0,13, 10=0,051, 50=0,051, 100=0,043, 1000=0,029, 10000=0,022 (USD)", REACH SVHC=Yes, RoHS=Compliant, Schedule B="8532240020, 8532240020|8532240020, 8532240020|8532240020|8532240020, 8532240020|8532240020|8532240020|8532240020", Stock 1=19671, Supplier 1=Mouser, Thickness=800µm, Voltage Rating=25V, Voltage Rating (DC)=25V, Width=800µm
C7 C14 C20 C27: library part GRT1885C1E103JA02J, "Multi-Layer Ceramic Capacitor 0.01uF 25VDC C0G 5% 0603 Paper T/R", .Case/Package=0603, .Voltage Rating (DC)=25V, Dielectric Material=Ceramic, Manufacturer=Murata, Manufacturer Lifecycle Status="IN PRODUCTION", Max Operating Temperature=125°C, Min Operating Temperature=-55°C, Supplier Part Number 1=81-GRT1885C1E103JA2J, Temperature Coefficient=30ppm/°C, Tolerance=5%, Capacitance=10nF, Case/Package=0603, Category="Ceramic Capacitors", ComponentLink1Description=https://datasheet.octopart.com:443/GRT1885C1E103JA02J-Murata-datasheet-141284073.pdf?src-supplier=Geoflip, ComponentLink1URL=https://datasheet.octopart.com:443/GRT1885C1E103JA02J-Murata-datasheet-141284073.pdf?src-supplier=Geoflip, ComponentLink2Description=https://datasheet.octopart.com:443/GRT1885C1E103JA02J-Murata-datasheet-140711081.pdf?src-supplier=Ciiva, ComponentLink2URL=https://datasheet.octopart.com:443/GRT1885C1E103JA02J-Murata-datasheet-140711081.pdf?src-supplier=Ciiva, ComponentLink3Description=https://datasheet.octopart.com:443/GRT1885C1E103JA02J-Murata-datasheet-138748798.pdf?src-supplier=Ciiva, ComponentLink3URL=https://datasheet.octopart.com:443/GRT1885C1E103JA02J-Murata-datasheet-138748798.pdf?src-supplier=Ciiva, ComponentLink4Description=http://sigma.octopart.com:80/reach_statement/Murata-company-16.pdf?src-supplier=Compliance+Statements, ComponentLink4URL=http://sigma.octopart.com:80/reach_statement/Murata-company-16.pdf?src-supplier=Compliance+Statements, Height=800µm, Length=1.6mm, Lifecycle Status=Production, Manufacturer Part Number=GRT1885C1E103JA02J, Material=Ceramic, Mount="Surface Mount", Number of Terminals=2, Pricing 1="1=0,15, 10=0,061, 50=0,061, 100=0,053, 1000=0,036, 10000=0,025 (USD)", REACH SVHC=Yes, RoHS=Compliant, Stock 1=7621, Supplier 1=Mouser, Thickness=800µm, Voltage Rating=25V, Voltage Rating (DC)=25V, Width=800µm
C8 C15 C21 C28 C42 C45 C46 C49: library part CAP_GRM188R61E106KA73J, "Multilayer Ceramic Capacitor, 10 uF, 25 V, 10%, X5R, 0603 1608 Metric - T/R", .Case/Package=0603, .Voltage Rating (DC)=25V, Dielectric=X5R, Dielectric Material=Ceramic, Manufacturer=Murata, Manufacturer Lifecycle Status="IN PRODUCTION", Manufacturer Part Number=GRM188R61E106KA73J, Max Operating Temperature=85°C, Min Operating Temperature=-55°C, Supplier Part Number 1=81-GRM188R61E106KA3J, Tolerance=10%, Capacitance=10µF, Case/Package=0603, Category="Ceramic Capacitors", ComponentLink1Description=https://datasheet.octopart.com:443/GRM188R61E106KA73J-Murata-datasheet-165579666.pdf?src-supplier=TME, ComponentLink1URL=https://datasheet.octopart.com:443/GRM188R61E106KA73J-Murata-datasheet-165579666.pdf?src-supplier=TME, ComponentLink2Description=https://datasheet.octopart.com:443/GRM188R61E106KA73J-Murata-datasheet-141274968.pdf?src-supplier=Ciiva, ComponentLink2URL=https://datasheet.octopart.com:443/GRM188R61E106KA73J-Murata-datasheet-141274968.pdf?src-supplier=Ciiva, ComponentLink3Description=https://datasheet.octopart.com:443/GRM188R61E106KA73J-Murata-datasheet-140704821.pdf?src-supplier=Ciiva, ComponentLink3URL=https://datasheet.octopart.com:443/GRM188R61E106KA73J-Murata-datasheet-140704821.pdf?src-supplier=Ciiva, ComponentLink4Description=https://datasheet.octopart.com:443/GRM188R61E106KA73J-Murata-datasheet-138742889.pdf?src-supplier=Ciiva, ComponentLink4URL=https://datasheet.octopart.com:443/GRM188R61E106KA73J-Murata-datasheet-138742889.pdf?src-supplier=Ciiva, ComponentLink5Description=https://datasheet.octopart.com/GRM188R61E106KA73J-Murata-datasheet-12515295.pdf, ComponentLink5URL=https://datasheet.octopart.com/GRM188R61E106KA73J-Murata-datasheet-12515295.pdf, ComponentLink6Description=https://datasheet.octopart.com/GRM188R61E106KA73J-Murata-datasheet-12510076.pdf, ComponentLink6URL=https://datasheet.octopart.com/GRM188R61E106KA73J-Murata-datasheet-12510076.pdf, ComponentLink7Description=https://datasheet.octopart.com/GRM188R61E106KA73J-Murata-datasheet-11978611.pdf, ComponentLink7URL=https://datasheet.octopart.com/GRM188R61E106KA73J-Murata-datasheet-11978611.pdf, ComponentLink8Description=https://datasheet.octopart.com/GRM188R61E106KA73J-Murata-datasheet-10025737.pdf, ComponentLink8URL=https://datasheet.octopart.com/GRM188R61E106KA73J-Murata-datasheet-10025737.pdf, ComponentLink9Description=https://datasheet.octopart.com/GRM188R61E106KA73J-Murata-datasheet-8819587.pdf, ComponentLink9URL=https://datasheet.octopart.com/GRM188R61E106KA73J-Murata-datasheet-8819587.pdf, ComponentLink10Description=http://sigma.octopart.com:80/reach_statement/Murata-company-16.pdf?src-supplier=Compliance+Statements, ComponentLink10URL=http://sigma.octopart.com:80/reach_statement/Murata-company-16.pdf?src-supplier=Compliance+Statements, Height=800µm, Length=1.6mm, Lifecycle Status=Production, Material=Ceramic, Mount="Surface Mount", Number of Terminals=2, Pricing 1="1=0,23, 10=0,097, 50=0,097, 100=0,086, 1000=0,06, 10000=0,047 (USD)", REACH SVHC=Yes, RoHS=Compliant, Stock 1=115551, Supplier 1=Mouser, Thickness=800µm, Voltage Rating=25V, Voltage Rating (DC)=25V, Width=800µm
C31: library part GRM319R61C226KE15D, "16V 22uF X5R ±10% 1206 Multilayer Ceramic Capacitors MLCC - SMD/SMT ROHS", .Case/Package=1206, .Voltage Rating (DC)=16V, Dielectric=X5R, Dielectric Material=Ceramic, Manufacturer=Murata, Manufacturer Lifecycle Status="IN PRODUCTION", Max Operating Temperature=85°C, Min Operating Temperature=-55°C, Supplier Part Number 1=81-GRM319R61C226KE5D, Tolerance=10%, Capacitance=22µF, Case/Package=1206, Category="Ceramic Capacitors", ComponentLink1Description=https://datasheet.octopart.com:443/GRM319R61C226KE15D-Murata-datasheet-141279449.pdf?src-supplier=Geoflip, ComponentLink1URL=https://datasheet.octopart.com:443/GRM319R61C226KE15D-Murata-datasheet-141279449.pdf?src-supplier=Geoflip, ComponentLink2Description=https://datasheet.octopart.com:443/GRM319R61C226KE15D-Murata-datasheet-165579666.pdf?src-supplier=TME, ComponentLink2URL=https://datasheet.octopart.com:443/GRM319R61C226KE15D-Murata-datasheet-165579666.pdf?src-supplier=TME, ComponentLink3Description=https://datasheet.octopart.com:443/GRM319R61C226KE15D-Murata-datasheet-140708055.pdf?src-supplier=Ciiva, ComponentLink3URL=https://datasheet.octopart.com:443/GRM319R61C226KE15D-Murata-datasheet-140708055.pdf?src-supplier=Ciiva, ComponentLink4Description=https://datasheet.octopart.com:443/GRM319R61C226KE15D-Murata-datasheet-138745361.pdf?src-supplier=Ciiva, ComponentLink4URL=https://datasheet.octopart.com:443/GRM319R61C226KE15D-Murata-datasheet-138745361.pdf?src-supplier=Ciiva, ComponentLink5Description=https://datasheet.octopart.com/GRM319R61C226KE15D-Murata-datasheet-12515295.pdf, ComponentLink5URL=https://datasheet.octopart.com/GRM319R61C226KE15D-Murata-datasheet-12515295.pdf, ComponentLink6Description=https://datasheet.octopart.com/GRM319R61C226KE15D-Murata-datasheet-12510076.pdf, ComponentLink6URL=https://datasheet.octopart.com/GRM319R61C226KE15D-Murata-datasheet-12510076.pdf, ComponentLink7Description=https://datasheet.octopart.com/GRM319R61C226KE15D-Murata-datasheet-11978611.pdf, ComponentLink7URL=https://datasheet.octopart.com/GRM319R61C226KE15D-Murata-datasheet-11978611.pdf, ComponentLink8Description=https://datasheet.octopart.com/GRM319R61C226KE15D-Murata-datasheet-10025737.pdf, ComponentLink8URL=https://datasheet.octopart.com/GRM319R61C226KE15D-Murata-datasheet-10025737.pdf, ComponentLink9Description=https://datasheet.octopart.com/GRM319R61C226KE15D-Murata-datasheet-8819587.pdf, ComponentLink9URL=https://datasheet.octopart.com/GRM319R61C226KE15D-Murata-datasheet-8819587.pdf, ComponentLink10Description=https://datasheet.octopart.com:443/GRM319R61C226KE15D-Murata-datasheet-142045692.pdf?src-supplier=Arrow.cn, ComponentLink10URL=https://datasheet.octopart.com:443/GRM319R61C226KE15D-Murata-datasheet-142045692.pdf?src-supplier=Arrow.cn, ComponentLink11Description=http://sigma.octopart.com:80/reach_statement/Murata-company-16.pdf?src-supplier=Compliance+Statements, ComponentLink11URL=http://sigma.octopart.com:80/reach_statement/Murata-company-16.pdf?src-supplier=Compliance+Statements, Height=850µm, Length=3.2mm, Lifecycle Status=Production, Manufacturer Part Number=GRM319R61C226KE15D, Material=Ceramic, Mount="Surface Mount", Number of Terminals=2, Pricing 1="1=0,38, 10=0,17, 50=0,17, 100=0,151, 1000=0,111, 10000=0,093 (USD)", REACH SVHC=Yes, RoHS=Compliant, Schedule B=8532240020, Stock 1=9742, Supplier 1=Mouser, Thickness=850µm, Voltage Rating=16V, Voltage Rating (DC)=16V, Width=1.6mm
C32 C33 C34 C35: library part CAP_Kemet_C0603C471K8HACAUTO, "Cap, 470Pf, 10V, Mlcc, 0603 Rohs Compliant: Yes", .Case/Package=0603, .Voltage Rating (DC)=10V, Dielectric=X8R, Dielectric Material=Ceramic, Manufacturer=KEMET, Manufacturer Part Number=C0603C471K8HACAUTO, Max Operating Temperature=150°C, Min Operating Temperature=-55°C, Supplier Part Number 1=80-C0603C471K8HAUTO, Temperature Coefficient=30ppm/°C, Capacitance=470pF, Case/Package=0603, Category="Ceramic Capacitors", China RoHS=Compliant, ComponentLink1Description=https://datasheet.octopart.com:443/C0603C471K8HACAUTO-KEMET-datasheet-178087918.pdf?src-supplier=IHS, ComponentLink1URL=https://datasheet.octopart.com:443/C0603C471K8HACAUTO-KEMET-datasheet-178087918.pdf?src-supplier=IHS, ComponentLink2Description=https://datasheet.octopart.com:443/C0603C471K8HACAUTO-KEMET-datasheet-137357764.pdf?src-supplier=Upverter, ComponentLink2URL=https://datasheet.octopart.com:443/C0603C471K8HACAUTO-KEMET-datasheet-137357764.pdf?src-supplier=Upverter, ComponentLink3Description=https://datasheet.octopart.com:443/C0603C471K8HACAUTO-KEMET-datasheet-189885776.pdf?src-supplier=element14+APAC, ComponentLink3URL=https://datasheet.octopart.com:443/C0603C471K8HACAUTO-KEMET-datasheet-189885776.pdf?src-supplier=element14+APAC, ComponentLink4Description=https://datasheet.octopart.com:443/C0603C471K8HACAUTO-KEMET-datasheet-170520340.pdf?src-supplier=Newark, ComponentLink4URL=https://datasheet.octopart.com:443/C0603C471K8HACAUTO-KEMET-datasheet-170520340.pdf?src-supplier=Newark, ComponentLink5Description=https://datasheet.octopart.com:443/C0603C471K8HACAUTO-KEMET-datasheet-154276014.pdf?src-supplier=Farnell, ComponentLink5URL=https://datasheet.octopart.com:443/C0603C471K8HACAUTO-KEMET-datasheet-154276014.pdf?src-supplier=Farnell, ComponentLink6Description=https://datasheet.octopart.com/C0603C471K8HACAUTO-KEMET-datasheet-84169754.pdf, ComponentLink6URL=https://datasheet.octopart.com/C0603C471K8HACAUTO-KEMET-datasheet-84169754.pdf, Height=800µm, Lead Free="Lead Free", Length=1.6mm, Lifecycle Status=Production, Material=Ceramic, Mount="Surface Mount", Number of Terminals=2, Pricing 1="1=0,1, 10=0,036, 50=0,036, 100=0,031, 1000=0,021, 10000=0,012 (USD)", REACH SVHC=Yes, RoHS=Compliant, Stock 1=9072, Supplier 1=Mouser, Voltage Rating=10V, Voltage Rating (DC)=10V, Width=800µm
C36: library part Pana_400_1000, .Case/Package=Axial, .Voltage Rating (DC)=400V, Capacitance=1000uF, Case/Package=Axial, Voltage=400V, Voltage Rating (DC)=400V
C41: library part MKT1813510405, "Film Capacitor, Polyester, 400V, 10% +Tol, 10% -Tol, 1uF, Through Hole Mount", .Case/Package=Axial, .Voltage Rating (DC)=400V, Dielectric=PET, Dielectric Material=Polyester, Manufacturer=Vishay, Max Operating Temperature=100°C, Min Operating Temperature=-55°C, Supplier Part Number 1=75-MKT1813510405, Tolerance=10%, Voltage Rating (AC)=200V, Capacitance=1µF, Case/Package=Axial, Category="Film Capacitors", China RoHS=Compliant, ComponentLink1Description=https://datasheet.octopart.com:443/MKT1813-510-405-Vishay-datasheet-181963145.pdf?src-supplier=IHS, ComponentLink1URL=https://datasheet.octopart.com:443/MKT1813-510-405-Vishay-datasheet-181963145.pdf?src-supplier=IHS, ComponentLink2Description=https://datasheet.octopart.com:443/MKT1813510405-Vishay-datasheet-26824198.pdf?src-supplier=Farnell, ComponentLink2URL=https://datasheet.octopart.com:443/MKT1813510405-Vishay-datasheet-26824198.pdf?src-supplier=Farnell, ComponentLink3Description=https://datasheet.octopart.com:443/MKT1813510405-Vishay-datasheet-159614172.pdf?src-supplier=Farnell, ComponentLink3URL=https://datasheet.octopart.com:443/MKT1813510405-Vishay-datasheet-159614172.pdf?src-supplier=Farnell, ComponentLink4Description=https://datasheet.octopart.com:443/MKT1813510405-Vishay-datasheet-8454534.pdf?src-supplier=Farnell, ComponentLink4URL=https://datasheet.octopart.com:443/MKT1813510405-Vishay-datasheet-8454534.pdf?src-supplier=Farnell, ComponentLink5Description=https://datasheet.octopart.com:443/MKT1813510405-Vishay-datasheet-638509.pdf?src-supplier=Farnell, ComponentLink5URL=https://datasheet.octopart.com:443/MKT1813510405-Vishay-datasheet-638509.pdf?src-supplier=Farnell, ComponentLink6Description=https://datasheet.octopart.com:443/MKT1813510405-Vishay-datasheet-164876301.pdf?src-supplier=Burklin+Elektronik, ComponentLink6URL=https://datasheet.octopart.com:443/MKT1813510405-Vishay-datasheet-164876301.pdf?src-supplier=Burklin+Elektronik, ComponentLink7Description=https://datasheet.octopart.com:443/MKT1813510405-Vishay-datasheet-11745928.pdf?src-supplier=Arrow+Electronics, ComponentLink7URL=https://datasheet.octopart.com:443/MKT1813510405-Vishay-datasheet-11745928.pdf?src-supplier=Arrow+Electronics, ComponentLink8Description=https://datasheet.octopart.com:443/MKT1813510405-Vishay-datasheet-161884.pdf?src-supplier=Mouser, ComponentLink8URL=https://datasheet.octopart.com:443/MKT1813510405-Vishay-datasheet-161884.pdf?src-supplier=Mouser, ComponentLink9Description=https://datasheet.octopart.com:443/MKT1813510405-Vishay-datasheet-9388.pdf?src-supplier=Newark, ComponentLink9URL=https://datasheet.octopart.com:443/MKT1813510405-Vishay-datasheet-9388.pdf?src-supplier=Newark, ComponentLink10Description=http://sigma.octopart.com:80/rohs_statement/Vishay-company-15.pdf?src-supplier=Compliance+Statements, ComponentLink10URL=http://sigma.octopart.com:80/rohs_statement/Vishay-company-15.pdf?src-supplier=Compliance+Statements, Diameter=13.5mm, Export Control Classification Number (ECCN) Code=EAR99, Harmonized Tariff Schedule (HTS) Code=8532.25.00.60, Introduction Date=2000-11-01, Lead Diameter=800µm, Lead Length=40mm, Length=31.5mm, Life (Hours)=300000hours, Lifecycle Status=Production, Manufacturer Part Number=MKT1813510405, Mount="Through Hole", Number of Pins=1813, Number of Terminals=2, Packaging=Bulk, Pricing 1="1=4,13, 10=3, 50=2,48, 100=2,31, 1000=1,72, 10000=1,54 (USD)", Radiation Hardening=No, REACH SVHC=Yes, RoHS=Compliant, Stock 1=114, Supplier 1=Mouser, Termination=Axial, Voltage=400V, Voltage Rating (DC)=400V
D1 D2 D3 D4: "Schottky Diodes - Dual Anode Common Cathode - 30 V - 220mV - SMD - SOT-23-3"
D5 R24: library part RC0805JR-101KL, "Res Thick Film 0805 1K Ohm 5% 0.125W(1/8W) ±100ppm/C Pad SMD T/R", .Case/Package=0805, .Tolerance=5%, Case Code (Metric)=2012, Manufacturer="Yageo Group", Max Operating Temperature=155°C, Min Operating Temperature=-55°C, Power Dissipation=125mW, Supplier Part Number 1=603-RC0805JR-101KL, Temperature Coefficient=100ppm/°C, Voltage Rating=150V, Case Code (Imperial)=0805, Case/Package=0805, Category="Chip SMD Resistors", China RoHS=Non-Compliant, ComponentLink1Description=https://datasheet.octopart.com:443/RC0805JR-101KL-Yageo-datasheet-175887523.pdf?src-supplier=IHS, ComponentLink1URL=https://datasheet.octopart.com:443/RC0805JR-101KL-Yageo-datasheet-175887523.pdf?src-supplier=IHS, ComponentLink2Description=https://datasheet.octopart.com:443/RC0805JR-101KL-Yageo-datasheet-8330313.pdf?src-supplier=element14+APAC, ComponentLink2URL=https://datasheet.octopart.com:443/RC0805JR-101KL-Yageo-datasheet-8330313.pdf?src-supplier=element14+APAC, ComponentLink3Description=https://datasheet.octopart.com/RC0805JR-101KL-Yageo-datasheet-73766026.pdf, ComponentLink3URL=https://datasheet.octopart.com/RC0805JR-101KL-Yageo-datasheet-73766026.pdf, ComponentLink4Description=http://sigma.octopart.com:80/conflict_mineral_statement/Yageo-company-3.pdf?src-supplier=Compliance+Statements, ComponentLink4URL=http://sigma.octopart.com:80/conflict_mineral_statement/Yageo-company-3.pdf?src-supplier=Compliance+Statements, ComponentLink5Description=http://sigma.octopart.com:80/rohs_statement/Yageo-company-2.pdf?src-supplier=Compliance+Statements, ComponentLink5URL=http://sigma.octopart.com:80/rohs_statement/Yageo-company-2.pdf?src-supplier=Compliance+Statements, Composition="Thick Film", Contact Plating=Tin, Country of Origin="Mainland China, Taiwan", Depth=1.25mm, Export Control Classification Number (ECCN) Code=EAR99, Harmonized Tariff Schedule (HTS) Code=8533.21.00.30, Height=500µm, Introduction Date=2004-09-22, Length=2mm, Lifecycle Status=Production, Manufacturer Part Number=RC0805JR-101KL, Military Standard=Not, Mount="Surface Mount", Number of Pins=2, Number of Terminals=2, Packaging="Tape & Reel", Power Rating=125mW, Pricing 1="1=0,1, 10=0,010, 50=0,010, 100=0,006, 1000=0,006, 10000=0,004 (USD)", Radiation Hardening=No, REACH SVHC=Yes, Resistance=1kΩ, RoHS=Compliant, Schedule B=8533210045, Stock 1=25236, Supplier 1=Mouser, Termination=SMD/SMT, Tolerance=5%, Voltage Rating (DC)=150V, Width=1.25mm, Working Voltage=150V
J6 J7 J8 J9: "Receptor Connector Optical Fiber"
L1 L2 L3 L4: "Inductor Power Shielded Multi-Layer 22uH 20% 1MHz Ferrite 0.2A 3.12Ohm DCR 0603 T/R", .RMS Current (Irms)=200mA, .Value=22µH, Case/Package=0603, DC Resistance (DCR)=3.12Ω, Manufacturer=Murata, Max Operating Temperature=125°C, Min Operating Temperature=-55°C, Saturation Current=50mA, Self Resonant Frequency=15MHz, Test Frequency=1MHz, Tolerance=20%, Category="Fixed Inductors", ComponentLink1Description=http://sigma.octopart.com:80/reach_statement/Murata-company-16.pdf?src-supplier=Compliance+Statements, ComponentLink1URL=http://sigma.octopart.com:80/reach_statement/Murata-company-16.pdf?src-supplier=Compliance+Statements, Core Material=Ferrite, Height=800µm, Inductance=22µH, Lifecycle Status=Production, Manufacturer Part Number=LQM18DN220M70L, Max Current Rating=200mA, Number of Circuits=1, Number of Terminals=2, Pricing 1="1=0,12, 10=0,096, 50=0,096, 100=0,079, 1000=0,065, 10000=0,053 (USD)", REACH SVHC=Yes, Resistance=3.12Ω, RMS Current (Irms)=200mA, RoHS=Compliant, Series Resistance=3.12Ω, Shielding=Yes, Stock 1=8810, Supplier 1=Mouser, Width=800µm